# Altium PCB PCB2.PcbDoc
Units mm, origin at the board's own origin, x right, y up, seen from the top; angles counter-clockwise.
Board outline 53.62 x 24.26 mm, 2 copper layers (Top Layer, Bottom Layer); 20 components, 22 nets, 80 pads, 10 vias.
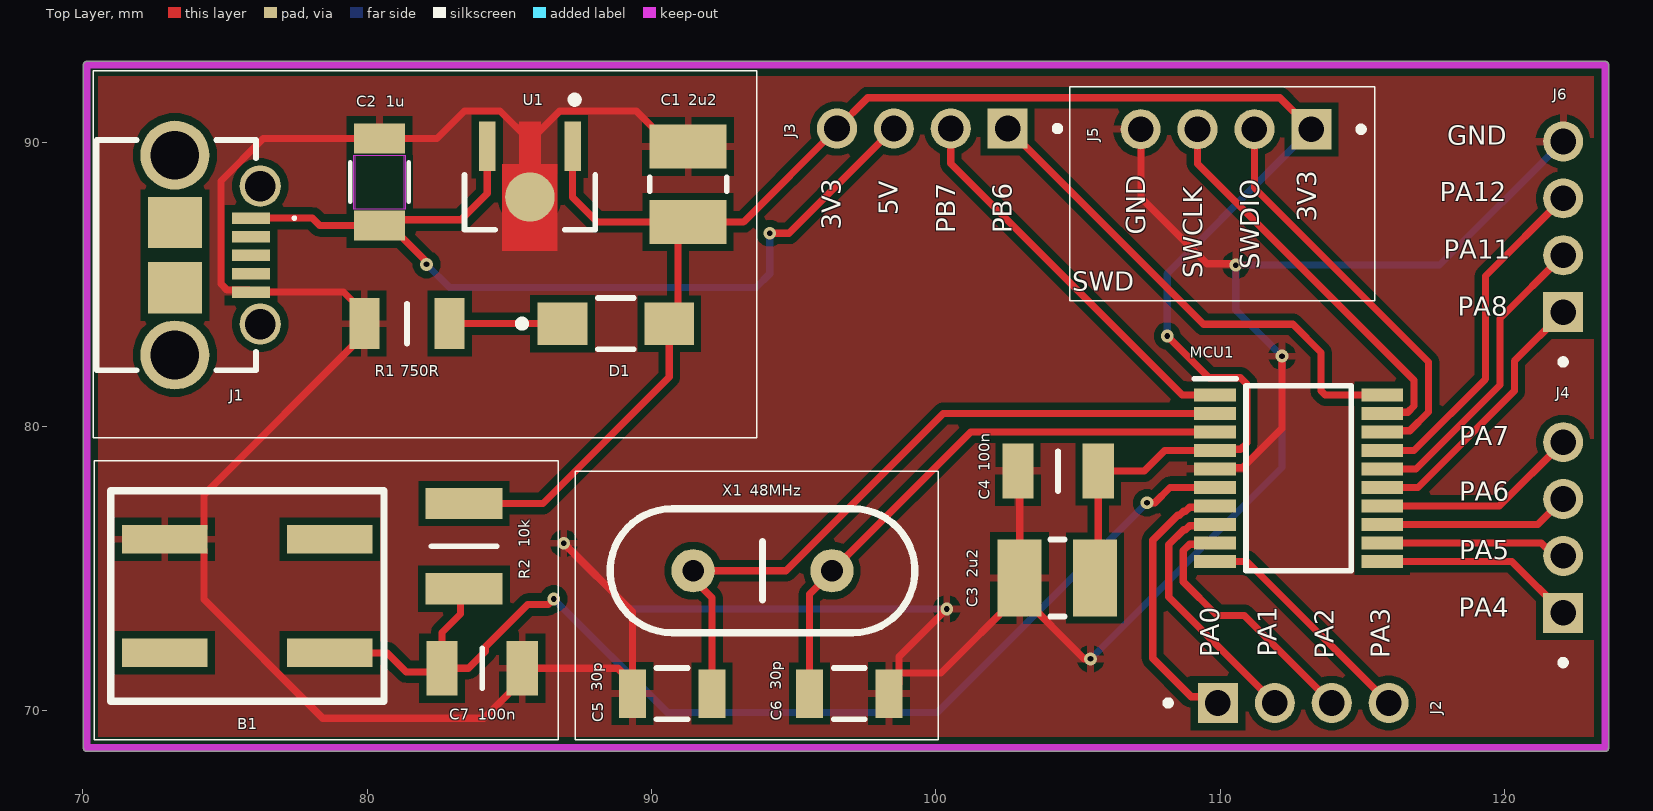
[diagram p0: Top Layer view]
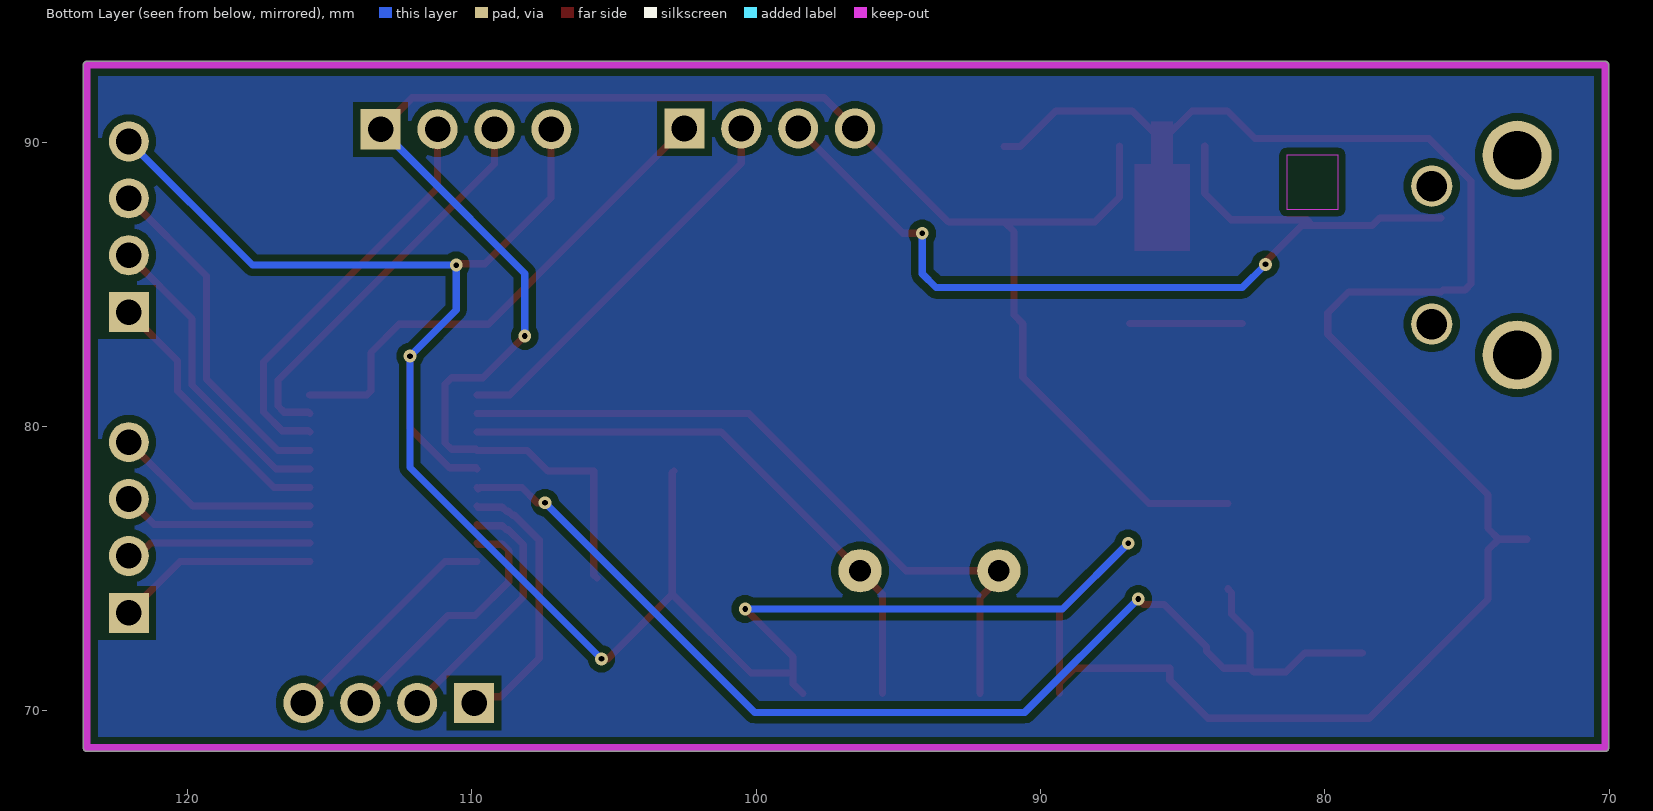
[diagram p1: Bottom Layer view, seen from below]
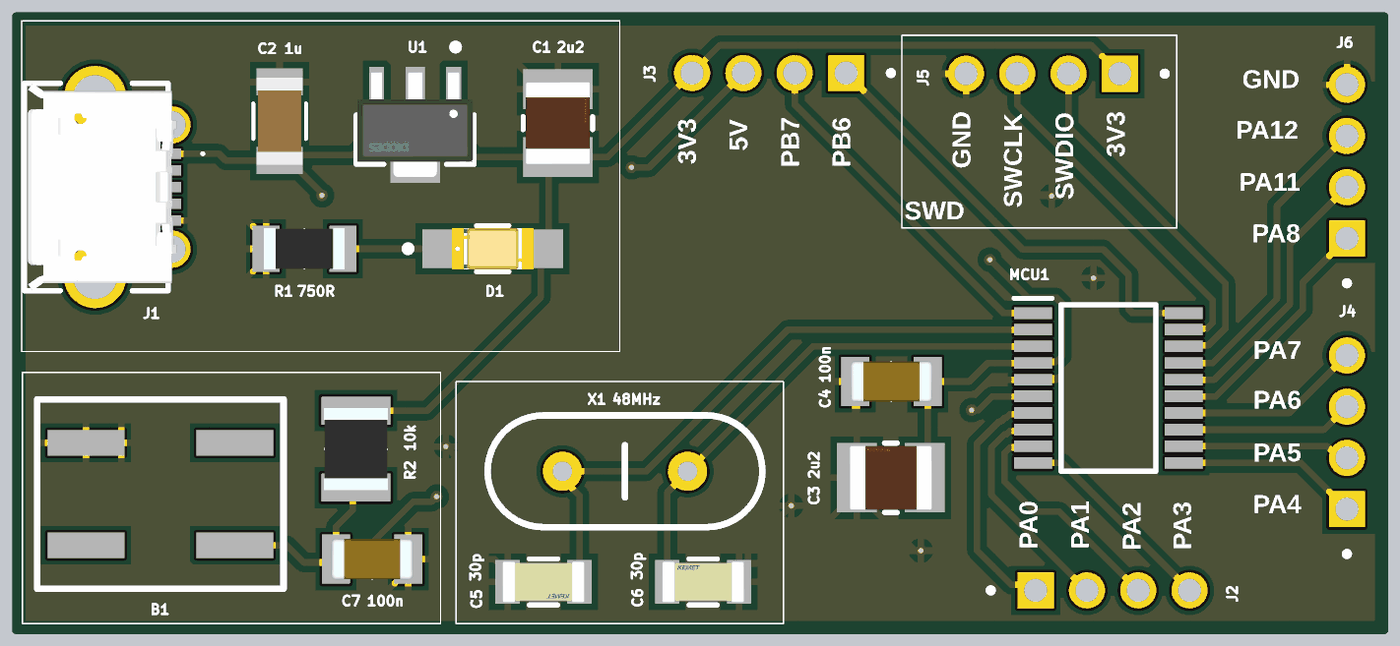
[diagram p2: 3D render of the assembled board from above, using the file's embedded part models]

## Layer stack, top to bottom
Top Solder: solder mask 0.0102, Solder Resist, Dk 3.5
Top Layer: signal copper 0.0356
Dielectric 1: dielectric 0.32, FR-4, Dk 4.8
Bottom Layer: signal copper 0.0356
Bottom Solder: solder mask 0.0102, Solder Resist, Dk 3.5

## Board outline
70.027,68.707 ccw(c70.155,68.707) 70.155,68.58 123.52,68.58 ccw(c123.52,68.707) 123.648,68.707 123.648,92.71 ccw(c123.52,92.71) 123.52,92.837 70.155,92.837 ccw(c70.155,92.71) 70.027,92.71

## Design rules (kind name [scope] priority, off if disabled: settings)
Clearance [All] p1: gap=0.254 ignorepadtopadclearanceinfootprint=FALSE except(0: Arc-Hole Track-Hole SMDPad-Hole THPad-Hole Via-Hole Fill-Hole Poly-Hole Region-Hole Text-Hole)
PolygonConnect [All] p1: connectstyle=Relief reliefconductorwidth=0.254 reliefentries=4 polygonreliefangle="90 Angle" airgapwidth=0.254
RoutingVias [All] p1: holewidth=0.711 width=1.27 viastyle="Through Hole" minholewidth=0.711 minwidth=1.27 maxholewidth=0.711 maxwidth=1.27
SolderMaskExpansion SolderMaskExpansion_1 [IsVia] p1: expansion=0.102 istentingtop=TRUE
SolderMaskExpansion [All] p2: expansion=0.102 istentingtop=FALSE
Width [All] p1: maxlimit=0.254 minlimit=0.254 preferedwidth=0.254
30 further rules are at their usual default settings.

## Components (designator, comment, footprint, x,y, rotation, side; value= is the part's Value field where it differs from the comment)
B1 "button" buttonf 75.794,74.041 r270 top
C1 "2u2" FP-1210-L_3_2_0_3-W_2_5_0-IPC_B 91.288,88.519 r90 top
C2 "1u" CAPC340180_180N_KEM 80.442,88.595 r90 top
C3 "2u2" FP-1210-L_3_2_0_3-W_2_5_0-IPC_B 104.267,74.676 r180 top
C4 "100n" CAPC3216X178N 104.292,78.435 r180 top
C5 "30p" FP-C1206C-EB-MFG 90.729,70.612 r180 top value="30 pF"
C6 "30p" FP-C1206C-EB-MFG 96.952,70.612 r0 top value="30 pF"
C7 "100n" CAPC3216X178N 84.049,71.501 r0 top
D1 "APT3216LSECK/J4-PRV" FP-APT3216LSECK-J4-PRV-MFG 88.748,83.617 r0 top
J1 "ZX62D-B-5PA8_30_" ZX62DB5PA830 73.296,86.025 r270 top
J2 "G8250041000YEU" AMPHENOL_G8250041000YEU 112.912,70.282 r0 top
J3 "G8250041000YEU" AMPHENOL_G8250041000YEU 99.52,90.475 r180 top
J4 "G8250041000YEU" AMPHENOL_G8250041000YEU 122.047,76.451 r90 top
J5 "G8250041000YEU" AMPHENOL_G8250041000YEU 110.195,90.449 r180 top
J6 "G8250041000YEU" AMPHENOL_G8250041000YEU 122.047,87.02 r90 top
MCU1 "STM32C011F4P6" SOP65P640X120-20N 112.751,78.181 r0 top
R1 "750R" RESC3216X60N 81.406,83.617 r180 top
R2 "10k" RESC3225X60N 83.414,75.795 r90 top
U1 "AP7381-33Y-13" FP-SOT89-MFG 85.725,88.214 r180 top
X1 "48MHz" crystal48MHzf 93.904,74.93 r180 top

## Footprints (in the part's own frame and the unit in brackets; to place one, negate y for a bottom-side part, rotate by r counter-clockwise, add the part's x,y. Pads: shape width x height; smd on the part's side, far side on the other; paste and mask are expansions set on the pad)
AMPHENOL_G8250041000YEU [mm]
  rect 1.408x1.408 hole 0.9: 1(-3,0)
  round 1.408 hole 0.9: 2(-1,0) 3(1,0) 4(3,0)
  silkscreen extent -4.85,-0.1 -4.65,0.1
buttonf [mm]
  rect 1x3 smd: 1(-2,-2.9) 2(-2,2.9) 3(2,-2.9) 4(2,2.9)
  silkscreen extent -3.7,-4.8 3.7,4.8
CAPC3216X178N [mm]
  rect 1.1x1.92 smd: 1(-1.41,0) 2(1.41,0)
  silkscreen extent 0,-0.7 0,0.7, body extent -1.6,-0.8 1.6,0.8, height 1.78
CAPC340180_180N_KEM [mm]
  rect 1.056x1.8 smd paste+0 mask+0: 1(-1.528,0) 2(1.528,0)
  Top Layer keep-out region: -0.949,-0.849 -0.949,0.849 0.949,0.849 0.949,-0.849
  Keep-Out Layer region: -0.949,-0.9 -0.949,0.9 0.949,0.9 0.949,-0.9
  silkscreen extent -0.69,-1.03 0.69,1.03, body extent -1.7,-0.9 1.7,0.9, height 1.8
crystal48MHzf [mil]
  round 60 hole 30: 1(-96.06,0) 2(96.06,0)
  silkscreen extent -211,-86 211,86
FP-1210-L_3_2_0_3-W_2_5_0-IPC_B [mm]
  rect 1.553x2.706 smd paste+0 mask+0: 1(-1.325,0) 2(1.325,0)
  silkscreen extent -0.25,-1.35 0.25,1.35, body extent -2.35,-1.6 2.35,1.6, height 0.25
FP-APT3216LSECK-J4-PRV-MFG [mm]
  rect 1.75x1.5 smd paste+0 mask+0: 1(-1.875,0) 2(1.875,0)
  silkscreen extent -3.42,-0.9 0.63,0.9, body extent -2.85,-1 2.85,1, height 0.25
FP-C1206C-EB-MFG [mm]
  rect 0.95x1.7 smd paste+0 mask+0: 1(-1.4,0) 2(1.4,0)
  silkscreen extent -0.55,-0.9 0.55,0.9, body extent -2,-1 2,1, height 0.25
FP-SOT89-MFG [mm]
  rect 0.58x1.73 smd paste+0 mask+0: 1(-1.5,-1.635) 3(1.5,-1.635)
  round 1.74 smd paste+0 mask+0: 2(0,0.146)
  Top Layer region: -0.38,-2.5 -0.38,-1 -0.967,-1 -0.967,2.03 0.967,2.03 0.967,-1 0.38,-1 0.38,-2.5
  silkscreen extent -2.3,-3.4 2.3,1.3, body extent -2.4,-2.6 2.4,2.13, height 0.25
RESC3216X60N [mm]
  rect 1.05x1.8 smd: 1(-1.5,0) 2(1.5,0)
  silkscreen extent 0,-0.7 0,0.7, body extent -1.58,-0.8 1.58,0.8, height 0.6
RESC3225X60N [mm]
  rect 1.1x2.7 smd: 1(-1.5,0) 2(1.5,0)
  silkscreen extent 0,-1.15 0,1.15, body extent -1.6,-1.25 1.6,1.25, height 0.6
SOP65P640X120-20N [mm]
  rect 1.475x0.45 smd: 1(-2.938,2.925) 2(-2.938,2.275) 3(-2.938,1.625) 4(-2.938,0.975) 5(-2.938,0.325) 6(-2.938,-0.325) 7(-2.938,-0.975) 8(-2.938,-1.625) 9(-2.938,-2.275) 10(-2.938,-2.925) 11(2.938,-2.925) 12(2.938,-2.275) 13(2.938,-1.625) 14(2.938,-0.975) 15(2.938,-0.325) 16(2.938,0.325) 17(2.938,0.975) 18(2.938,1.625) 19(2.938,2.275) 20(2.938,2.925)
  silkscreen extent -3.67,-3.25 1.85,3.5
ZX62DB5PA830 [mm]
  rect 0.4x1.35 smd: 1(-1.3,2.625) 2(-0.65,2.625) 3(0,2.625) 4(0.65,2.625) 5(1.3,2.625)
  round 1.45 hole 1.07: MH1(-2.425,2.95) MH2(2.425,2.95)
  round 2.425 hole 1.71: MH3(3.512,-0.05) MH4(-3.512,-0.05)
  rect 1.8x1.9 smd: MP1(-1.15,-0.05) MP2(1.15,-0.05)
  silkscreen extent -4.05,-2.8 4.05,4.2, body extent -4.05,-2.67 4.05,3.13, height 2.79

## Part data
C1 C3: library part CMP-14477-002986-2, "None", Capacitance=2.2uF, Case/Package=Ceramic, Dielectric=X7R, Max Operating Temperature=125°C, Min Operating Temperature=-55°C, Tolerance=10%, Contact Plating=Tin, Length=3.2mm, Mount="Surface Mount", RoHS Compliant=Yes, Termination=Wraparound
C2: library part C1206F105K5RAC7800, "C1206F105K5RAC7800", Mfr_Name=Kemet
C4 C7: library part 12062C104JAT2A, "Cap Ceramic 0.1uF 200V X7R 5% Pad SMD 1206 125C T/R. 12062C104JAT2A", Manufacturer_Name="Kyocera AVX", Mouser Part Number=581-12062C104JAT2A, Datasheet Link=https://datasheets.avx.com/X7RDielectric.pdf, Geometry.Height=1.78mm, Manufacturer_Part_Number=12062C104JAT2A, Mouser Price/Stock=https://www.mouser.co.uk/ProductDetail/AVX/12062C104JAT2A?qs=ZBeOGGPQgEEapHNxb9gG6A%3D%3D
C5 C6: library part CMP-1037-01110-2, "Cap Ceramic 30pF 100V C0G 5% SMD 1206 125°C Plastic T/R", Capacitance="30 pF", Manufacturer=KEMET, Manufacturer Part Number=C1206C300J1GACTU, Package=C1206C-EB, Temperature="-55°C to +150°C", Temperature Characteristic=C0G, Temperature Coefficient=15%, Temperature Range High=+150°C, Temperature Range Low=-55°C, Tolerance=0.05, Voltage Rating="100 V", Automotive=Yes, Automotive Grade="Grade 0", Category=Cap, ComponentLink2Description=Datasheet, ComponentLink2URL=https://content.kemet.com/datasheets/KEM_C1007_X8R_ULTRA_150C_SMD.pdf, Device Class L1="Passive Components", Device Class L2=Capacitors, Device Class L3="Ceramic Capacitors", Digikey Description="Cap Ceramic 30pF 100V C0G 5% SMD 1206 125°C Plastic T/R", Height=0.88mm, Ipc Land Pattern Name=CAPC320160X78, Lead Free=Yes, Material=Ceramic, Mouser Description="Cap Ceramic 30pF 100V C0G 5% SMD 1206 125°C Plastic T/R", Octopart=https://octopart.com/c1206c300j1gactu-kemet-16861015, RoHS=TRUE
D1: library part CMP-44529-000067-1, "LED ORANGE CLEAR 2SMD", Case Code (Imperial)=1206, Case Code (Metric)=3216, Color=Orange, Forward Voltage=1.8V, Lens Color=Colorless, Test Current=2mA, Case/Package=1206, Dominant Wavelength=605nm, Height=0.75mm, Length=3.2mm, Lens Transparency=Clear, Luminous Intensity=50mcd, Mount="Surface Mount", Packaging="Tape and Reel", RoHS Compliant=Yes, Viewing Angle=120°, Width=1.6mm
J1: "USB - micro B USB 2.0 Receptacle Connector 5 Position Surface Mount, Right Angle; Through Hole", Manufacturer_Name=Hirose, Manufacturer_Part_Number=ZX62D-B-5PA8(30), Mouser Part Number=798-ZX62D-B-5PA830, Datasheet Link=https://www.hirose.com/en/product/document?clcode=CL0242-0056-3-30&productname=ZX62D-B-5PA8(30)&series=ZX&documenttype=2DDrawing&lang=en&documentid=0001147958, Geometry.Height=3mm, Mouser Price/Stock=https://www.mouser.co.uk/ProductDetail/Hirose-Connector/ZX62D-B-5PA830?qs=1Nn7v2rJFSJs6IftS%252BmZAw%3D%3D
J2 J3 J4 J5 J6: "Board mount - Header Plug - Pin Header 2.0mm Pitch Vertical,1x4Pin,Gold Flash,LCP,4.0mm*2.0mm*2.8mm", Package=None, Availability="In Stock", Check_prices=https://www.snapeda.com/parts/G8250041000YEU/Amphenol+Commercial+Products/view-part/?ref=eda, MF="Amphenol ICC (Commercial Products)", MP=G8250041000YEU, Price=None, Purchase-URL=https://pricing.snapeda.com/search/part/G8250041000YEU/?ref=eda, SnapEDA_Link=https://www.snapeda.com/parts/G8250041000YEU/Amphenol+Commercial+Products/view-part/?ref=snap
MCU1: "ARM Cortex-M0+ STM32L0 Microcontroller IC 32-Bit Single-Core 32MHz 16KB (16K x 8) FLASH 20-TSSOP", Manufacturer_Name=STMicroelectronics, Mouser Part Number=511-STM32C011F4P6, Datasheet Link=https://www.st.com/resource/en/datasheet/stm32c011d6.pdf, Geometry.Height=1.2mm, Manufacturer_Part_Number=STM32C011F4P6, Mouser Price/Stock=https://www.mouser.co.uk/ProductDetail/STMicroelectronics/STM32C011F4P6?qs=IPgv5n7u5Qbo1GzhbgPEPw%3D%3D
R1: library part CRCW1206750RJNTA, "Lead (Pb)-Bearing Thick Film, Rectangular Chip Resistors. 750R. CRCW1206750RJNTA", Manufacturer_Name=Vishay, Datasheet Link=https://www.mouser.co.uk/datasheet/2/427/dcrcw-72725.pdf, Geometry.Height=0.6mm, Manufacturer_Part_Number=CRCW1206750RJNTA
R2: library part CRCW121010K0JNEAIF, "10 kOhms +/-5% 0.5W, 1/2W Chip Resistor 1210 (3225 Metric) Automotive AEC-Q200, Pulse Withstanding Thick Film. CRCW121010K0JNEAIF", Manufacturer_Name=Vishay, Datasheet Link=https://www.vishay.com/docs/20024/dcrcwife3.pdf, Geometry.Height=0.6mm, Manufacturer_Part_Number=CRCW121010K0JNEAIF
U1: library part CMP-12756-000003-1, "IC REG LINEAR 3.3V 150MA SOT89", Ambient Temperature Range High=+85°C, Ambient Temperature Range Low=-40°C, Dropout Voltage=1000mV, Manufacturer="Diodes Inc.", Max Junction Temp=+125°C, Max Supply Voltage=40V, Min Supply Voltage=3.3V, Nominal Supply Current=2.5-25uA, Output Current=150mA, Package=SOT89, Temperature="-40°C to +125°C", Automotive=No, Category=IC, ComponentLink2Description=Datasheet, ComponentLink2URL=https://www.diodes.com/assets/Datasheets/AP7381.pdf, Device Class L1="Integrated Circuits (ICs)", Device Class L2="Power Management ICs", Device Class L3="Voltage Regulators - Linear", Digikey Description="IC REG LINEAR 3.3V 150MA SOT89", Footprint Url=https://www.diodes.com/assets/Package-Files/SOT89.pdf, Height=1.6mm, Lead Free=Yes, Manufacturer Part Number=AP7381-33Y-13, Number Of Outputs=1, Octopart=https://octopart.com/ap7381-33y-13-diodes+inc.-87775115, Output Type=Fixed, Output Voltage=3.3V, RoHS=TRUE, Temperature Range High=+125°C, Temperature Range Low=-40°C
X1: library part crystal48MHz

## Via types
v1: diameter 0.45, hole 0.2, Top Layer to Bottom Layer, tented both sides, 10 vias

## Nets (pads, with @x,y where several pads share a name; then routed paths per layer and width w, separated by ;. In a path a pad name is that pad's centre, name@x,y a point inside that pad or via, vN(x,y) a via of type N, cw(c..) or ccw(c..) an arc to the next point about the centre after c; other vN are vias at no path point)
+3V3: C1.1 C3.1 C4.1 D1.2 J3.4 J5.1 MCU1.4 R2.2 U1.1 | length 69.5
  Top Layer w0.254: R2.2 86.185,77.295 90.627,81.737 90.627,83.612 D1.2 90.932,83.926 90.932,86.853 C1.1@91.272,87.194 ; U1.1 87.225,88.06 88.092,87.194 C1.1@91.272,87.194 ; C3.1 105.702,74.786 C4.1 107.325,78.435 108.046,79.156 MCU1.4 109.857,79.2 110.708,79.2 110.931,79.423 110.931,81.489 110.708,81.712 109.601,81.712 v1(108.128,83.185) ; J5.1 112.084,91.56 97.605,91.56 J3.4 93.239,87.194 C1.1 C1.1@91.272,87.194
  Bottom Layer w0.254: v1(108.128,83.185) 108.128,85.383 111.91,89.165 J5.1
+5: C2.1 J1.1 J3.3 U1.3 | length 32.7
  Top Layer w0.254: J1.1 78.08,87.325 78.337,87.067 C2.1 ; v1(82.093,85.7) 82.093,85.789 80.814,87.067 C2.1 ; U1.3 84.225,88.187 83.303,87.265 80.639,87.265 C2.1 ; v1(94.158,86.792) 94.837,86.792 J3.3
  Bottom Layer w0.254: v1(82.093,85.7) 82.906,84.887 93.675,84.887 94.158,85.369 v1(94.158,86.792)
diodeNet: D1.1 R1.1 | length 4
  Top Layer w0.254: R1.1 D1.1
GND: B1.1 C1.2 C2.2 C3.2 C4.2 C5.2 C6.2 C7.2 J1.5 J5.4 J6.4 MCU1.5 R1.2 U1.2 | length 142.1
  Top Layer w0.254: B1.1 B1.1@73.894,76.041 ; U1.2 85.725,90.043 ; v1(86.919,75.895) 89.329,73.485 C5.2@89.329,70.987 ; C5.2 C5.2@89.329,70.987 ; C1.2 90.711,89.844 89.46,91.095 86.777,91.095 85.725,90.043 ; C6.2 98.7,70.96 C6.2@98.7,71.335 ; v1(100.381,73.584) 98.7,71.903 C6.2@98.7,71.335 ; C4.2 102.942,78.376 C3.2 C3.2@102.942,74.1 ; v1(105.435,71.831) 105.21,71.831 C3.2@102.942,74.1 ; J5.4 107.204,90.44 107.204,88.046 109.525,85.725 110.49,85.725 v1(110.541,85.674) ; MCU1.5 109.857,78.55 110.776,78.55 112.166,79.94 v1(112.166,82.474) ; B1.1@73.894,76.041 74.267,75.668 74.267,73.929 78.447,69.748 84.116,69.748 85.459,71.091 C7.2 88.815,71.501 C5.2@89.329,70.987 ; B1.1@73.894,76.041 74.267,76.414 74.267,77.603 79.906,83.242 R1.2 79.906,83.992 79.172,84.725 J1.5 75.852,84.794 75.088,84.794 74.865,85.017 74.865,88.633 76.354,90.123 C2.2 82.458,90.123 83.43,91.095 84.673,91.095 85.725,90.043 ; C6.2@98.7,71.335 100.177,71.335 C3.2@102.942,74.1
  Bottom Layer w0.254: v1(86.919,75.895) 89.23,73.584 v1(100.381,73.584) ; v1(105.435,71.831) 112.166,78.562 v1(112.166,82.474) 110.541,84.099 v1(110.541,85.674) 117.701,85.674 J6.4
NRST: B1.4 C7.1 MCU1.6 R2.1 | length 40.6
  Top Layer w0.254: B1.4 80.715,72.041 81.382,71.374 82.512,71.374 C7.1 ; R2.1 83.287,74.168 83.287,73.406 82.639,72.758 C7.1 ; v1(86.563,73.939) 86.369,73.745 85.654,73.745 84.16,72.251 84.16,72.092 83.57,71.501 C7.1 ; v1(107.417,77.318) 107.692,77.318 108.23,77.856 109.725,77.856 109.769,77.812 MCU1.6
  Bottom Layer w0.254: v1(86.563,73.939) 90.551,69.952 100.051,69.952 v1(107.417,77.318)
OSC_IN: C5.1 MCU1.2 X1.2 | length 25.2
  Top Layer w0.254: C5.1 92.129,73.979 91.464,74.644 X1.2 94.727,74.93 100.254,80.456 MCU1.2
OSC_OUT: C6.1 MCU1.3 X1.1 | length 20.1
  Top Layer w0.254: C6.1 95.552,74.106 96.344,74.898 X1.1 101.22,79.806 MCU1.3
PA0: J2.1 MCU1.7 | length 9.8
  Top Layer w0.254: MCU1.7 109.769,77.162 108.917,77.162 108.775,77.02 108.707,77.02 108.565,76.878 108.496,76.878 107.62,76.002 107.62,71.857 108.976,70.5 109.694,70.5 J2.1
PA1: J2.2 MCU1.8 | length 9
  Top Layer w0.254: MCU1.8 109.769,76.512 108.917,76.512 108.775,76.37 108.707,76.37 108.186,75.849 108.186,74.008 J2.2
PA2: J2.3 MCU1.9 | length 9.3
  Top Layer w0.254: MCU1.9 109.769,75.862 108.917,75.862 108.694,75.639 108.694,74.542 109.88,73.355 110.839,73.355 J2.3
PA3: J2.4 MCU1.10 | length 8.2
  Top Layer w0.254: MCU1.10 110.938,75.256 J2.4
PA4: J4.1 MCU1.11 | length 7.1
  Top Layer w0.254: MCU1.11 120.242,75.256 J4.1
PA5: J4.2 MCU1.12 | length 6.5
  Top Layer w0.254: MCU1.12 121.28,75.906 121.735,75.451 J4.2
PA6: J4.3 MCU1.13 | length 6.7
  Top Layer w0.254: MCU1.13 121.152,76.556 J4.3
PA7: J4.4 MCU1.14 | length 7.3
  Top Layer w0.254: MCU1.14 119.802,77.206 J4.4
PA8: J6.1 MCU1.15 | length 9.5
  Top Layer w0.254: MCU1.15 116.944,77.856 120.333,81.245 120.333,82.306 J6.1
PA11: J6.2 MCU1.16 | length 10.8
  Top Layer w0.254: MCU1.16 116.876,78.506 119.825,81.455 119.825,83.798 J6.2
PA12: J6.3 MCU1.17 | length 12.2
  Top Layer w0.254: MCU1.17 116.807,79.156 119.317,81.666 119.317,85.29 J6.3
PB6: J3.1 MCU1.20 | length 17.8
  Top Layer w0.254: J3.1 109.403,83.591 112.547,83.591 113.538,82.601 113.538,81.255 113.687,81.106 MCU1.20
PB7: J3.2 MCU1.1 | length 13.9
  Top Layer w0.254: J3.2 100.52,89.243 108.657,81.106 MCU1.1
SWCLK: J5.3 MCU1.19 | length 14.1
  Top Layer w0.254: J5.3 109.195,89.237 116.807,81.624 116.807,80.723 116.584,80.5 115.733,80.5 MCU1.19
SWDIO: J5.2 MCU1.18 | length 14.4
  Top Layer w0.254: J5.2 111.195,88.385 117.315,82.265 117.315,80.513 116.652,79.85 115.733,79.85 MCU1.18
pads on no net: B1.2 B1.3 J1.2 J1.3 J1.4 J1.MH1 J1.MH2 J1.MH3 J1.MH4 J1.MP1 J1.MP2

## Polygon pours and split planes (outlines as drawn)
no net on Bottom Layer "NONET_L-01_P-001" (solid, pour order 1): 70.18,92.735 123.469,92.735 123.52,92.685 123.52,68.631 70.079,68.631 70.028,68.682
GND on Top Layer "NONET_L-01_P-001" (solid, pour order 0): 70.129,92.685 70.206,92.761 123.546,92.761 123.546,68.707 123.393,68.555 70.079,68.555

## Keep-outs
Keep-Out Layer:
  lines w0.254: 70.155,68.707 70.155,92.71 123.52,92.71 123.52,68.707 70.155,68.707

## Silkscreen, mask and mechanical layers (free items; w line width, h text height)
Top Overlay:
  lines w0.051: 70.383,79.604 70.383,92.507 93.701,92.507 93.701,79.604 70.383,79.604 ; 70.409,68.986 70.409,78.791 86.716,78.791 86.716,68.986 70.409,68.986 ; 87.325,68.986 87.325,78.435 100.076,78.435 100.076,68.986 87.325,68.986 ; 104.699,84.43 104.699,91.948 115.418,91.948 115.418,84.43 104.699,84.43
  text "GND" at 117.965,89.677 h1.14
  text "PA12" at 117.708,87.694 h1.14
  text "5V" at 98.885,87.434 h1.14 r90
  text "3V3" at 113.594,87.194 h1.14 r90
  text "3V3" at 96.881,86.914 h1.14 r90
  text "PB7" at 100.899,86.798 h1.14 r90
  text "PB6" at 102.901,86.793 h1.14 r90
  text "GND" at 107.579,86.748 h1.14 r90
  text "PA11" at 117.842,85.662 h1.14
  text "SWDIO" at 111.592,85.531 h1.14 r90
  text "SWCLK" at 109.586,85.217 h1.14 r90
  text "SWD" at 104.795,84.547 h1.14
  text "PA8" at 118.345,83.662 h1.14
  text "PA7" at 118.396,79.111 h1.14
  text "PA6" at 118.391,77.16 h1.14
  text "PA5" at 118.388,75.105 h1.14
  text "PA4" at 118.385,73.09 h1.14
  text "PA1" at 112.204,71.898 h1.14 r90
  text "PA0" at 110.19,71.891 h1.14 r90
  text "PA3" at 116.185,71.862 h1.14 r90
  text "PA2" at 114.211,71.841 h1.14 r90